# Altium PCB zasilaczsymetr.PcbDoc
Units mm, origin at the board's own origin, x right, y up, seen from the top; angles counter-clockwise.
Board outline 88 x 78 mm, 2 copper layers (Top Layer, Bottom Layer); 38 components, 17 nets, 92 pads, 0 vias.
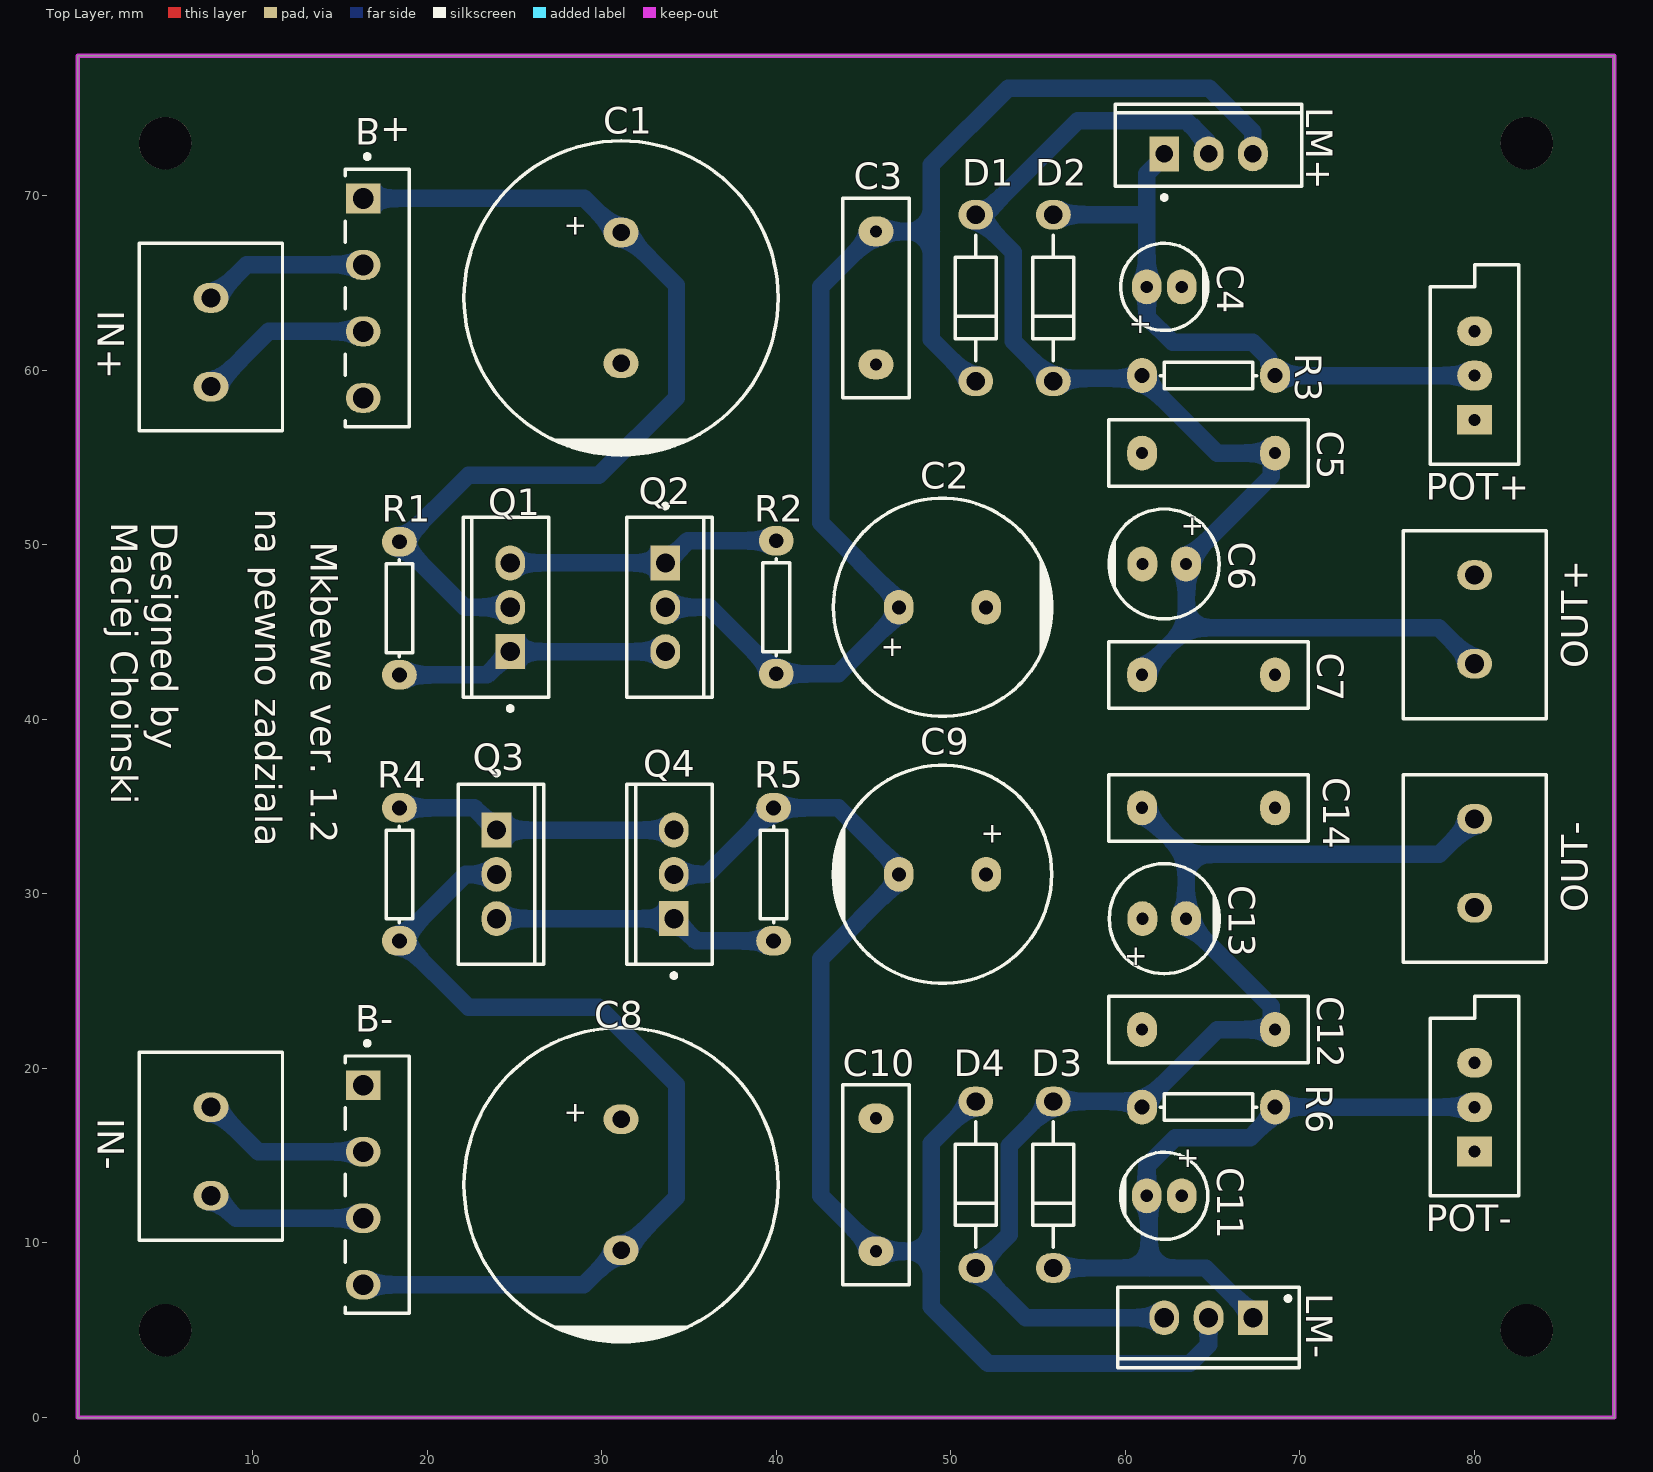
[diagram p0: Top Layer view]
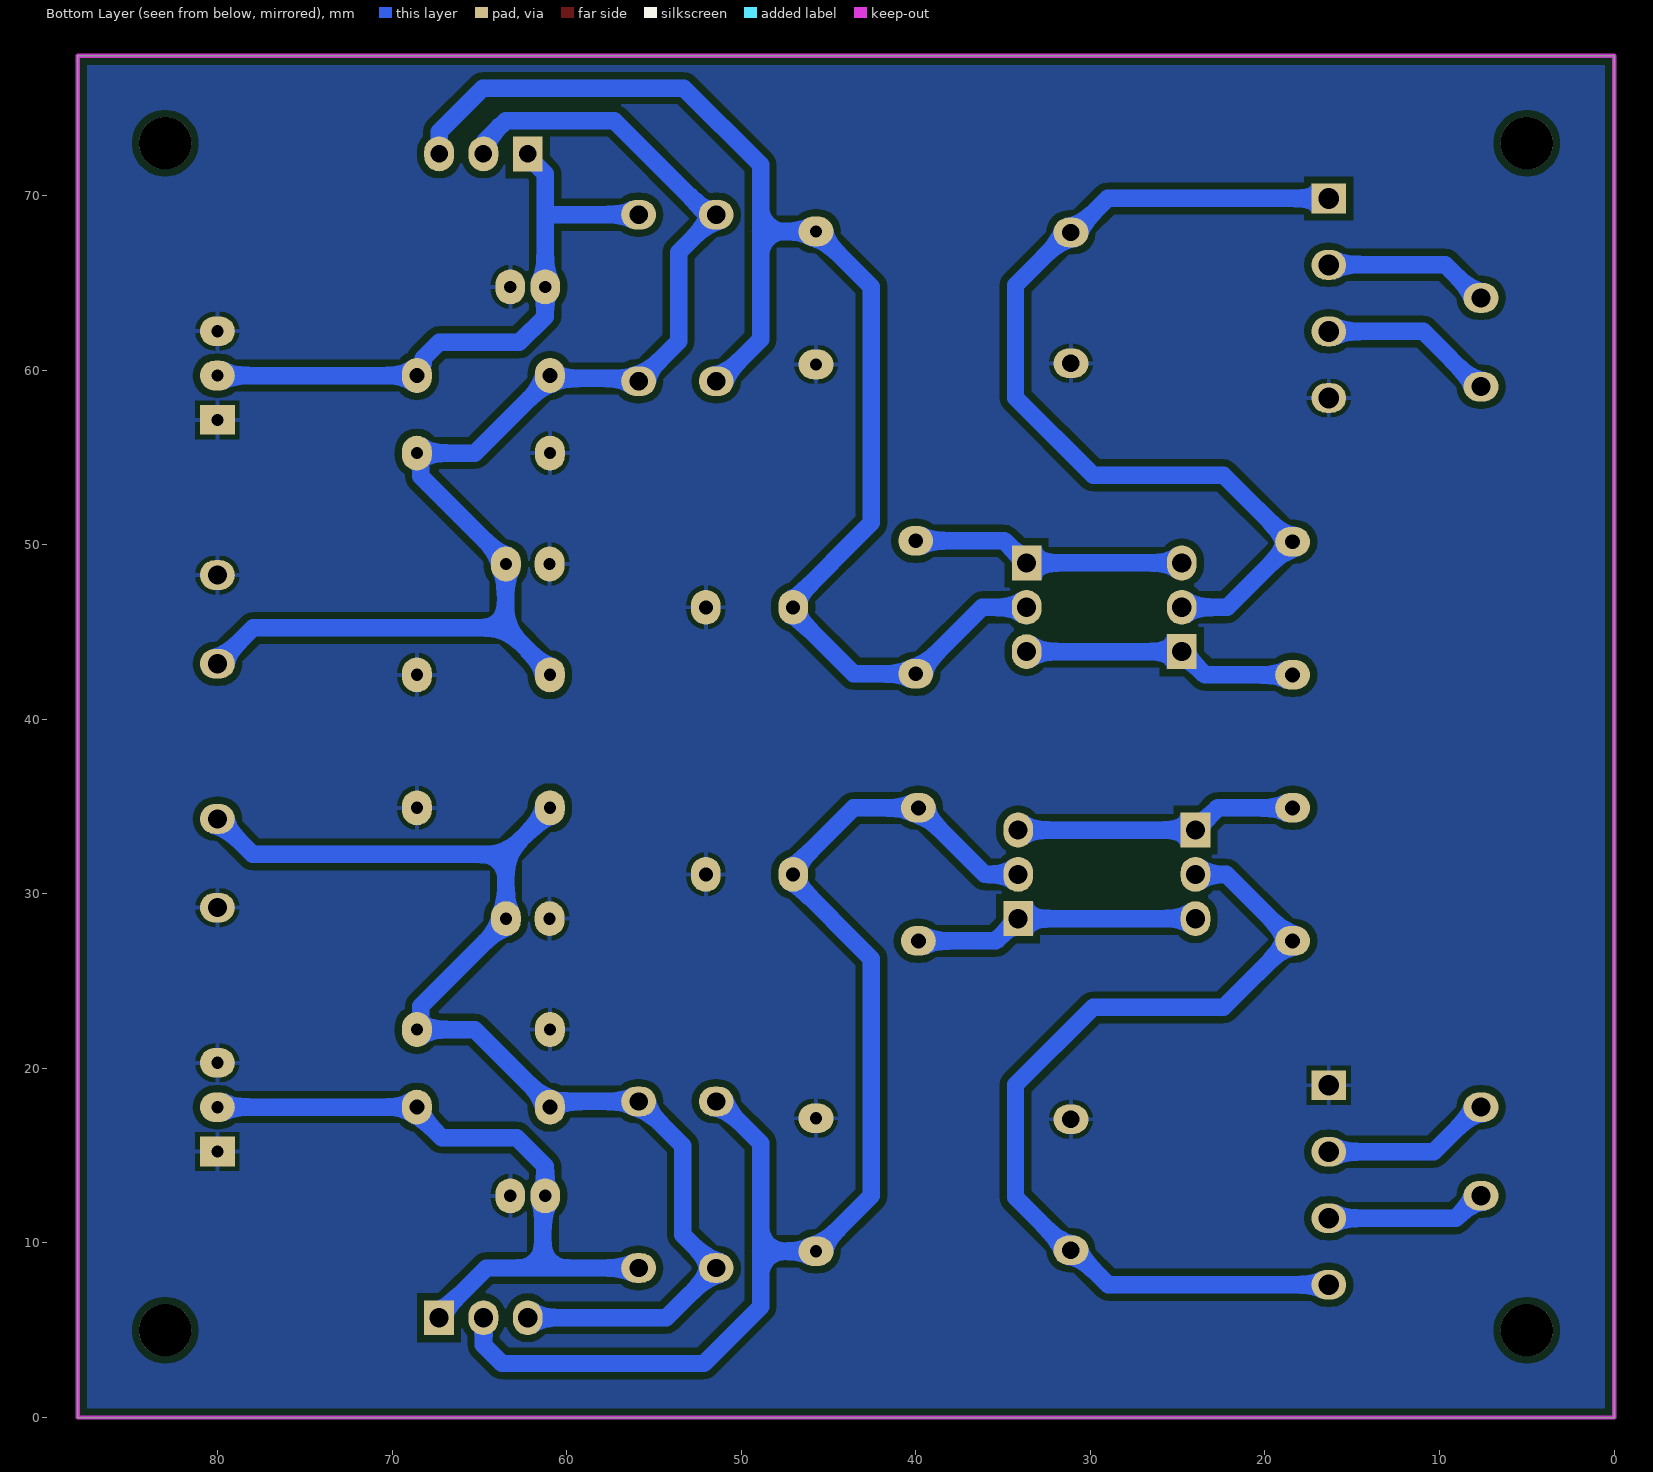
[diagram p1: Bottom Layer view, seen from below]

## Layer stack, top to bottom
Top Solder: solder mask 0.0102, Solder Resist, Dk 3.5
Top Layer: signal copper 0.0356
Dielectric 1: dielectric 0.32, FR-4, Dk 4.8
Bottom Layer: signal copper 0.0356
Bottom Solder: solder mask 0.0102, Solder Resist, Dk 3.5

## Board outline
0,0 0,78 88,78 88,0

## Design rules (kind name [scope] priority, off if disabled: settings)
Clearance [All] p1: gap=0.25 ignorepadtopadclearanceinfootprint=FALSE except(0.4: Arc-Fill Arc-Poly Arc-Region Track-Fill Track-Poly Track-Region THPad-Fill THPad-Poly THPad-Region)
HoleSize [All] p1: absolutevalues=TRUE maxlimit=5 minlimit=0.25 maxpercent=80.000 minpercent=20.000
HoleToHoleClearance [All] p1: gap=0.5 allowstackedmicrovias=TRUE
MinimumAnnularRing [All] p1: minimumring=0.254
PolygonConnect [All] p1: connectstyle=Relief reliefconductorwidth=0.254 reliefentries=4 polygonreliefangle="90 Angle" airgapwidth=0.254
RoutingVias [All] p1: holewidth=0.4 width=0.6 viastyle="Through Hole" minholewidth=0.3 minwidth=0.6 maxholewidth=0.711 maxwidth=1.5
SolderMaskExpansion [All] p1: expansion=0.102 istentingtop=FALSE
UnRoutedNet [All] p1: checkbadconnections=TRUE
Width [All] p1: maxlimit=1.5 minlimit=0.127 preferedwidth=0.5
27 further rules are at their usual default settings.

## Components (designator, comment, footprint, x,y, rotation, side; value= is the part's Value field where it differs from the comment)
B+ "KBP206G" FP-KBP-MFG 17.145,64.135 r270 top value=25pF
B- "KBP206G" FP-KBP-MFG 17.145,13.335 r270 top value=25pF
C1 "4.7MF" "CAP TH ALUM ELEC D18.00mm S7.50mm H21.50mm" 31.115,64.135 r90 top
C2 "470µF" "CAP TH ALUM ELEC D12.50mm S5.00mm H14.00mm" 49.53,46.415 r180 top
C3 "Cap" RAD-0.3 45.72,64.135 r90 top value=100nF
C4 "22µF" "CAP TH ALUM ELEC D5.00mm S2.00mm H11.00mm" 62.23,64.77 r180 top
C5 "Cap" RAD-0.3 64.77,55.245 r0 top value=100nF
C6 "47µF" "CAP TH ALUM ELEC D6.30mm S2.50mm H11.00mm" 62.23,48.895 r0 top
C7 "Cap" RAD-0.3 64.77,42.545 r180 top value=100nF
C8 "4.7MF" "CAP TH ALUM ELEC D18.00mm S7.50mm H21.50mm" 31.115,13.335 r90 top
C9 "470µF" "CAP TH ALUM ELEC D12.50mm S5.00mm H14.00mm" 49.53,31.115 r0 top
C10 "Cap" RAD-0.3 45.72,13.335 r90 top value=100nF
C11 "22µF" "CAP TH ALUM ELEC D5.00mm S2.00mm H11.00mm" 62.23,12.7 r0 top
C12 "Cap" RAD-0.3 64.77,22.225 r180 top value=100nF
C13 "47µF" "CAP TH ALUM ELEC D6.30mm S2.50mm H11.00mm" 62.23,28.575 r180 top
C14 "Cap" RAD-0.3 64.77,34.925 r0 top value=100nF
D1 "1N4001" ONSC-AXIAL_LEAD-2-59-10_P 51.435,64.135 r90 top
D2 "1N4001" ONSC-AXIAL_LEAD-2-59-10_P 55.88,64.135 r90 top
D3 "1N4001" ONSC-AXIAL_LEAD-2-59-10_P 55.88,13.335 r90 top
D4 "1N4001" ONSC-AXIAL_LEAD-2-59-10_P 51.435,13.335 r90 top
IN+ "282837-2" "TE 282837-2" 7.62,61.595 r90 top
IN- "282837-2" "TE 282837-2" 7.62,15.24 r90 top
LM+ "LM317T" NDE0003A 64.77,72.39 r0 top
LM- "LM337SP" TO220 64.77,5.715 r180 top
OUT+ "282837-2" "TE 282837-2" 80.01,45.72 r270 top
OUT- "282837-2" "TE 282837-2" 80.01,31.75 r270 top
POT+ "RPot" VR5 80.01,59.69 r90 top value=2.7k
POT- "RPot" VR5 80.01,17.78 r90 top value=2.7k
Q1 "D44H8" ONSC-TO-220-3-221A-09 24.765,46.415 r180 top
Q2 "D44H8" ONSC-TO-220-3-221A-09 33.655,46.415 r0 top
Q3 "D44H8" ONSC-TO-220-3-221A-09 23.98,31.115 r0 top
Q4 "D44H8" ONSC-TO-220-3-221A-09 34.14,31.115 r180 top
R1 "Res1" AXIAL-0.3 18.415,46.355 r270 top value=220
R2 "Res1" AXIAL-0.3 40.005,46.415 r270 top value=1
R3 "Res1" AXIAL-0.3 64.77,59.69 r180 top value=220
R4 "Res1" AXIAL-0.3 18.415,31.115 r90 top value=1
R5 "Res1" AXIAL-0.3 39.855,31.115 r90 top value=220
R6 "Res1" AXIAL-0.3 64.77,17.78 r180 top value=220

## Footprints (in the part's own frame and the unit in brackets; to place one, negate y for a bottom-side part, rotate by r counter-clockwise, add the part's x,y. Pads: shape width x height; smd on the part's side, far side on the other; paste and mask are expansions set on the pad)
AXIAL-0.3 [mm] "Axial Device, Thru-Hole; 2 Leads; 0.3 in Pin Spacing"
  oval 1.7x2 hole 0.85: 1(-3.81,0) 2(3.81,0)
  silkscreen extent -2.77,-0.76 2.77,0.76
"CAP TH ALUM ELEC D5.00mm S2.00mm H11.00mm" [mm] "5mm Diameter 2mm Lead Spacing Aluminum Electrolytic Capacitors Radial, Can"
  oval 1.7x2 hole 0.7: 1(1,0) 2(-1,0)
  silkscreen extent -2.5,-2.5 2.5,2.5, body extent -2.51,-2.5 2.5,2.5, height 11
"CAP TH ALUM ELEC D6.30mm S2.50mm H11.00mm" [mm] "6.3mm Diameter 2.5mm Lead Spacing Aluminum Electrolytic Capacitors Radial, Can"
  oval 1.7x2 hole 0.7: 1(1.25,0) 2(-1.25,0)
  silkscreen extent -3.15,-3.15 3.15,3.15, body extent -3.16,-3.15 3.15,3.15, height 11
"CAP TH ALUM ELEC D12.50mm S5.00mm H14.00mm" [mm] "12.5mm Diameter 5mm Lead Spacing Aluminum Electrolytic Capacitors Radial, Can"
  oval 1.7x2 hole 0.8: 1(2.5,0) 2(-2.5,0)
  silkscreen extent -6.25,-6.25 6.25,6.25, body extent -6.26,-6.25 6.25,6.25, height 14
"CAP TH ALUM ELEC D18.00mm S7.50mm H21.50mm" [mm] "18mm Diameter 7.5mm Lead Spacing Aluminum Electrolytic Capacitors Radial, Can"
  oval 1.7x2 hole 1: 1(3.75,0) 2(-3.75,0)
  silkscreen extent -9,-9 9,9, body extent -9.01,-9 9,9, height 21.5
FP-KBP-MFG [mm]
  rect 1.7x2 hole 1.2 paste-1000 mask+0: 1(-5.7,-0.8)
  oval 1.7x2 hole 1.2 paste-1000 mask+0: 2(-1.89,-0.8) 3(1.92,-0.8) 4(5.73,-0.8)
  silkscreen extent -8.22,-1.82 7.38,1.82, body extent -7.25,-1.76 7.25,1.75, height 12.8
NDE0003A [mm] "FM, 3-Leads, Body 10.7x4.7mm, Pitch 2.54mm"
  rect 1.7x2 hole 1: 1(-2.54,0)
  oval 1.7x2 hole 1: 2(0,0) 3(2.54,0)
  silkscreen extent -5.35,-2.62 5.35,2.85, body extent -5.4,-1.9 5.4,2.9, height 19.4
ONSC-AXIAL_LEAD-2-59-10_P [mm] "AXIAL, 2-Leads, Diameter 2.35mm"
  oval 1.7x2 hole 1.05: 1(-4.77,0) 2(4.77,0)
  silkscreen extent -3.6,-1.18 3.6,1.18
ONSC-TO-220-3-221A-09 [mm] "FM, 3-Leads, Body 10.3x4.85mm, Pitch 2.54mm"
  rect 1.7x2 hole 1.1: 1(0,2.54)
  oval 1.7x2 hole 1.1: 2(0,0) 3(0,-2.54)
  silkscreen extent -2.21,-5.15 2.69,5.92, body extent -2.18,-5.15 2.67,5.15, height 19.85
RAD-0.3 [mm] "Radial Cap, Thru-Hole; 2 Leads; 0.3 in Pin Spacing"
  oval 1.7x2 hole 0.7: 1(-3.81,0) 2(3.81,0)
  silkscreen extent -5.71,-1.91 5.71,1.91
"TE 282837-2" [mm] "Wire to Board Terminal Block Horizontal with Board, 2 Postions, Body 10.76x8.2 mm, Pitch 5.08mm"
  oval 1.7x2 hole 1.1: 1(-2.54,0) 2(2.54,0)
  silkscreen extent -5.08,-4.1 5.68,4.1, body extent -5.08,-4.1 5.68,4.1, height 10.3
TO220 [mm] "TO, Thru-Hole, Vertical, Heatsink Mounted; 3 In-Line Leads; Pitch 2.54 mm"
  rect 1.7x2 hole 1.1: 1(-2.54,0)
  oval 1.7x2 hole 1.1: 2(0,0) 3(2.54,0)
  silkscreen extent -5.2,-1.75 5.2,2.85, body extent -5.25,-1.8 5.25,2.9, height 19.7
VR5 [mm] "Thru-Hole; 3 Leads"
  rect 1.7x2 hole 0.7: 1(-2.54,0)
  oval 1.7x2 hole 0.7: 2(0,0) 3(2.54,0)
  silkscreen extent -5.08,-2.54 6.35,2.54

## Part data
B+ B-: library part CMP-12791-000035-1, "BRIDGE RECT 1PHASE 600V 2A KBP", Capacitance=25pF, Forward Current=2A, manufacturer="Diodes Inc.", Max Junction Temp=+150°C, Max Repetitive Reverse Voltage=600V, Max Surge Forward Current=65A, Package=KBP, Peak Reverse Current=5uA, Temperature="-65°C to +150°C", Temperature Range Low=-65°C, Automotive=No, Category=Diode, componentlink2description=Datasheet, componentlink2url=https://www.diodes.com/assets/Datasheets/ds21205.pdf, Device Class L1="Discrete Semiconductors", Device Class L2=Diodes, Device Class L3="Rectifier Diodes", Digikey Description="BRIDGE RECT 1PHASE 600V 2A KBP", Footprint Url=https://www.diodes.com/assets/Package-Files/KBP.pdf, Height=12.8mm, Lead Free=Yes, Manufacturer Part Number=KBP206G, Mouser Description="Bridge Rectifiers 2.0A 600V", Octopart=https://octopart.com/kbp206g-diodes+inc.-330175, Reverse Voltage=600V, RoHS=TRUE, Standoff Height=1.8mm, Temperature Range High=+150°C
C1 C8: library part EKYC250ELL472MM20S, "ALUMINUM CAPACITOR", Device Package="Radial, Can", ESR (Equivalent Series Resistance)="37mOhm @ 100kHz", Lifetime @ Temp.="5000 Hrs @ 105°C", manufacturer="United Chemi-Con", Operating Temperature="-40°C ~ 105°C", Ratings=AEC-Q200, Ripple Current @ High Frequency="2.7A @ 100kHz", Ripple Current @ Low Frequency="2.295A @ 120Hz", Supplier Part Number 1=565-EKYC250ELL472MM20S-ND, Tolerance=±20%, Voltage - Rated=25V, Applications=Automotive, Capacitance=4.7MF, componentlink1description=Datasheet, componentlink1url=http://www.chemi-con.co.jp/cgi-bin/CAT_DB/SEARCH/cat_db_al.cgi?e=e&j=p&pdfname=kyc, componentlink2description="DigiKey Link", componentlink2url=http://digikey.com/product-detail/en/united-chemi-con/EKYC250ELL472MM20S/565-EKYC250ELL472MM20S-ND/10486416, Height - Seated (Max)="0.846\" (21.50mm)", lastupdated="02.09.2020 01:33:14", Lead Spacing="0.295\" (7.50mm)", Lifecycle Status=Active, Minimum Order=1, Mounting Type="Through Hole", Package / Case="Radial, Can", packaging=Bulk, Part Number=EKYC250ELL472MM20S, Part Status=Active, partid=18010, Polarization=Polar, price=1.57, series=KYC, Size / Dimension="0.709\" Dia (18.00mm)", Supplier 1=DigiKey
C2 C9: library part URZ1V471MHD, "CAP ALUM 470UF 20% 35V RADIAL", Device Package="Radial, Can", Lifetime @ Temp.="1000 Hrs @ 105°C", manufacturer=Nichicon, Operating Temperature="-55°C ~ 105°C", Ripple Current @ Low Frequency="420mA @ 120Hz", Supplier Part Number 1=493-15958-ND, Tolerance=±20%, Voltage - Rated=35V, Applications="General Purpose", Capacitance=470µF, componentlink1description=Datasheet, componentlink1url=http://nichicon-us.com/english/products/pdfs/e-urz.pdf, componentlink2description="DigiKey Link", componentlink2url=http://digikey.com/product-detail/en/nichicon/URZ1V471MHD/493-15958-ND/2539001, Height - Seated (Max)="0.551\" (14.00mm)", lastupdated="02.09.2020 01:31:53", Lead Spacing="0.197\" (5.00mm)", Lifecycle Status=Active, Minimum Order=1, Mounting Type="Through Hole", Package / Case="Radial, Can", packaging=Bulk, Part Number=URZ1V471MHD, Part Status=Active, partid=13716, Polarization=Polar, price=0.78, series=URZ, Size / Dimension="0.492\" Dia (12.50mm)", Supplier 1=DigiKey
C3 C5 C7 C10 C12 C14: "Capacitor", LatestRevisionDate=17-Jul-2002, LatestRevisionNote="Re-released for DXP Platform.", PackageDescription="Radial Cap, Thru-Hole; 2 Leads; 0.3 in Pin Spacing", PackageReference=RAD-0.3, Published=8-Jun-2000, Publisher="Altium Limited"
C4 C11: library part EEU-FC1V220, "CAP ALUM 22UF 20% 35V RADIAL", Device Package="Radial, Can", Lifetime @ Temp.="1000 Hrs @ 105°C", manufacturer="Panasonic Electronic Components", Operating Temperature="-55°C ~ 105°C", Ratings=AEC-Q200, Ripple Current @ High Frequency="175mA @ 100kHz", Ripple Current @ Low Frequency="113.8mA @ 120Hz", Supplier Part Number 1=P11230-ND, Tolerance=±20%, Voltage - Rated=35V, Applications=Automotive, Capacitance=22µF, componentlink1description=Datasheet, componentlink1url=http://industrial.panasonic.com/www-cgi/jvcr13pz.cgi?E+PZ+3+ABA0022+EEUFC1V220+7+WW, componentlink2description="DigiKey Link", componentlink2url=http://digikey.com/product-detail/en/panasonic-electronic-components/EEU-FC1V220/P11230-ND/356133, Height - Seated (Max)="0.433\" (11.00mm)", Impedance="800 mOhms", lastupdated="04.09.2020 23:28:57", Lead Spacing="0.079\" (2.00mm)", Lifecycle Status=Active, Minimum Order=1, Mounting Type="Through Hole", Package / Case="Radial, Can", packaging=Bulk, Part Number=EEU-FC1V220, Part Status=Active, partid=21502, Polarization=Polar, price=0.29, series=FC, Size / Dimension="0.197\" Dia (5.00mm)", Supplier 1=DigiKey
C6 C13: library part UKW1H470MED, "CAP ALUM 47UF 20% 50V RADIAL", Device Package="Radial, Can", Lifetime @ Temp.="2000 Hrs @ 85°C", manufacturer=Nichicon, Operating Temperature="-40°C ~ 85°C", Ripple Current @ High Frequency="300mA @ 10kHz", Ripple Current @ Low Frequency="150mA @ 120Hz", Supplier Part Number 1=493-15492-ND, Tolerance=±20%, Voltage - Rated=50V, Applications=Audio, Capacitance=47µF, componentlink1description=Datasheet, componentlink1url=http://nichicon-us.com/english/products/pdfs/e-ukw.pdf, componentlink2description="DigiKey Link", componentlink2url=http://digikey.com/product-detail/en/nichicon/UKW1H470MED/493-15492-ND/1964262, Height - Seated (Max)="0.433\" (11.00mm)", lastupdated="04.09.2020 01:05:43", Lead Spacing="0.098\" (2.50mm)", Lifecycle Status=Active, Minimum Order=1, Mounting Type="Through Hole", Package / Case="Radial, Can", packaging=Bulk, Part Number=UKW1H470MED, Part Status=Active, partid=19951, Polarization=Polar, price=0.47, series=UKW, Size / Dimension="0.248\" Dia (6.30mm)", Supplier 1=DigiKey
D1 D2 D3 D4: library part CMP-0902-00117-1, "Standard Recovery Rectifier, 2-Pin Axial_Lead, Pb-Free, Bulk Bag", manufacturer="On Semiconductor", componentlink1description="Manufacturer URL", componentlink1url=http://www.onsemi.com/, componentlink2description=Datasheet, componentlink2url=http://www.onsemi.com/pub_link/Collateral/1N4001-D.PDF, ComponentLink3Description="Package Specification", ComponentLink3URL=http://www.onsemi.cn/pub_link/Collateral/59-10.PDF, DatasheetVersion="Rev. 13", IFSM Max (A)=30, IO(rec) Max (A)=1, Mounting Technology="Through Hole", PackageDescription="2-Pin, Axial Lead, Diameter 2.35 mm", PackageReference=AXIAL_LEAD-2-59-10, PackageVersion="Rev. U, 02/2005", Packing="Bulk Bag", PartNumber=1N4001, RoHS=TRUE, Type="Standard Recovery", VRRM Max (V)=50
IN+ IN- OUT+ OUT-: "TERM BLK 2P SIDE ENT 5.08MM PCB", Color=Green, Current="13.5 A", manufacturer="TE Connectivity AMP Connectors", Supplier Part Number 1=A113320-ND, Voltage="300 V", componentlink1description=Datasheet, componentlink1url=https://www.te.com/commerce/DocumentDelivery/DDEController?Action=srchrtrv&DocNm=282837&DocType=Customer+Drawing&DocLang=English, componentlink2description="DigiKey Link", componentlink2url=https://www.digikey.com/en/products/detail/te-connectivity-amp-connectors/282837-2/2187973, Features="Interlocking (Side)", lastupdated="21.06.2022 15:00:23", Lifecycle Status=Active, Mating Orientation="Horizontal with Board", Minimum Order=1, Mounting Type="Through Hole", Number of Levels=1, packaging=Tray, Part Number=282837-2, Part Status=Active, Pitch="0.200\" (5.08mm)", Positions Per Level=2, price=0.31, series=Buchanan, Supplier 1=DigiKey, Wire Gauge="16-28 AWG", Wire Termination="Screw - Rising Cage Clamp"
LM+: library part CMP-0062-02456-3, "3-Terminal Adjustable Regulator, 3-pin TO-220", manufacturer="Texas Instruments", PackageTopMarking="NSUZXYTTE#*LM317T P+", PowerWise=N, componentlink1description="Datasheet URL", componentlink1url=http://www.ti.com/general/docs/lit/getliterature.tsp?genericPartNumber=LM317-N&fileType=pdf, CompType="LDO IC", PackageDescription="TO-220, Molded, 3 Lead, Straight", PackageReference=NDE0003A, PinCount=3, RoHS=N
LM-: library part CMP-0244-00420-1, "Three-Terminal Negative Voltage Regulator, 3-Pin TO-220", componentlink1description="Manufacturer URL", componentlink1url=http://www.st.com, componentlink2description=Datasheet, componentlink2url=http://www.st.com/internet/com/TECHNICAL_RESOURCES/TECHNICAL_LITERATURE/DATASHEET/CD00000468.pdf, ComponentLink3Description="Package Specification", ComponentLink3URL=http://www.st.com/internet/com/TECHNICAL_RESOURCES/TECHNICAL_LITERATURE/PACKAGE_INFORMATION/CD00004649.pdf, DatasheetVersion=1/10/2011, PackageDescription="TO, Thru-Hole, Vertical, Heatsink Mounted; 3 In-Line Leads; Pitch 2.54 mm", PackageReference=TO220, PackageVersion=ver3.0
POT+ POT-: "Potentiometer", LatestRevisionDate=17-Jul-2002, LatestRevisionNote="Re-released for DXP Platform.", PackageDescription="Variable Resistor, Thru-Hole; 3 Leads", PackageReference=VR5, Published=8-Jun-2000, Publisher="Altium Limited", Set Position=0.5, Sim Note="Enter the Resistance value and the set point into parameter fields."
Q1 Q2 Q3 Q4: library part CMP-1048-01189-1, "Complementary Silicon Power Transistor, 3-Pin TO-220, Tube", manufacturer="On Semiconductor", componentlink1description="Manufacturer URL", componentlink1url=http://www.onsemi.com/, componentlink2description=Datasheet, componentlink2url=http://www.onsemi.com/pub_link/Collateral/D44H-D.PDF, ComponentLink3Description="Package Specification", ComponentLink3URL=http://www.onsemi.com/pub_link/Collateral/221A-09.PDF, DatasheetVersion="Rev. 12", IC Continuous (A)=10, Mounting Technology="Through Hole", PackageDescription="3-Pin Flange Mount, Vertical Straight Lead, Body 9.97 x 4.445 mm, Pitch 2.54 mm", PackageReference=TO-220-3-221A-09, PackageVersion="Rev. AG, 09/2011", Packing=Tube, PartNumber=D44H8, Polarity=NPN, RoHS=FALSE
R1 R2 R3 R4 R5 R6: "Resistor", LatestRevisionDate=17-Jul-2002, LatestRevisionNote="Re-released for DXP Platform.", PackageDescription="Axial Device, Thru-Hole; 2 Leads; 0.3 in Pin Spacing", PackageReference=AXIAL-0.3, Published=8-Jun-2000, Publisher="Altium Limited"

## Free pads (board coordinates)
  round 3 hole 3: 2(5,5) 2(5,73) 2(83,5) 2(83,73)

## Nets (pads, with @x,y where several pads share a name; then routed paths per layer and width w, separated by ;. In a path a pad name is that pad's centre, name@x,y a point inside that pad or via, vN(x,y) a via of type N, cw(c..) or ccw(c..) an arc to the next point about the centre after c; other vN are vias at no path point)
GND: B+.4 B-.1 C1.2 C2.2 C3.1 C4.2 C5.1 C6.2 C7.1 C8.1 C9.1 C10.2 C11.1 C12.2 C13.1 C14.2 OUT+.1 OUT-.2 POT+.1 POT+.3 POT-.1 POT-.3
NetB+_1: B+.1 C1.1 Q1.2 R1.1 | length 53.6
  Bottom Layer w1: B+.1 29.015,69.835 30.965,67.885 C1.1 31.265,67.885 34.29,64.86 34.29,58.42 29.845,53.975 22.375,53.975 18.565,50.165 R1.1 22.165,46.415 Q1.2
NetB+_2: B+.2 IN+.2 | length 9.9
  Bottom Layer w1: IN+.2 7.77,64.135 9.675,66.04 16.33,66.04 B+.2 B+.2@15.98,66.025
NetB+_3: B+.3 IN+.1 | length 10
  Bottom Layer w1: IN+.1 7.77,59.055 10.93,62.215 B+.3
NetB-_2: B-.2 IN-.2 | length 9.8
  Bottom Layer w1: IN-.2 7.77,17.78 10.325,15.225 B-.2
NetB-_3: B-.3 IN-.1 | length 9.3
  Bottom Layer w1: IN-.1 7.77,12.7 9.055,11.415 B-.3
NetB-_4: B-.4 C8.2 Q3.2 R4.1 | length 52.9
  Bottom Layer w1: B-.4 28.985,7.605 30.965,9.585 C8.2 31.265,9.585 34.29,12.61 34.29,19.05 29.845,23.495 22.375,23.495 18.565,27.305 R4.1 22.225,31.115 Q3.2
NetC2_1: C2.1 C3.2 D1.1 LM+.3 Q2.2 R2.2 | length 80.7
  Bottom Layer w1: Q2.2 36.195,46.415 R2.2 43.57,42.605 47.03,46.065 C2.1 47.03,46.765 42.545,51.25 42.545,64.77 C3.2 48.895,67.945 ; D1.1 51.285,59.365 48.895,61.755 48.895,67.945 ; LM+.3 67.31,73.66 64.811,76.159 53.299,76.159 48.895,71.755 48.895,67.945
NetC4_1: C4.1 D2.2 LM+.1 POT+.2 R3.1 | length 35.7
  Bottom Layer w1: D2.2 61.158,68.905 61.23,68.977 ; LM+.1 62.23,72.24 61.23,71.24 61.23,68.905 C4.1 61.23,63.07 62.705,61.595 67.31,61.595 68.23,60.675 68.23,60.379 68.58,60.029 R3.1 POT+.2
NetC5_2: C5.2 C6.1 C7.2 D1.2 D2.1 LM+.2 OUT+.2 R3.2 | length 75.9
  Bottom Layer w1: D1.2 53.594,66.746 53.594,61.651 D2.1 56.043,59.527 60.797,59.527 R3.2 60.96,59.54 65.255,55.245 C5.2 68.35,55.015 68.35,53.915 63.48,49.045 C6.1 63.5,48.875 63.5,45.235 ; D1.2@51.655,68.786 52.124,69.255 52.225,69.255 57.265,74.295 63.5,74.295 64.655,73.14 64.655,72.505 LM+.2 ; C7.2 C7.2@61.595,43.18 ; C7.2@61.52,43.255 63.5,45.235 ; OUT+.2 77.955,45.235 63.5,45.235
NetC9_2: C9.2 C10.1 D4.2 LM-.2 Q4.2 R5.2 | length 76.3
  Bottom Layer w1: Q4.2 36.045,31.115 R5.2 43.57,34.925 47.03,31.465 C9.2 47.03,30.765 42.545,26.28 42.545,12.7 C10.1 48.895,9.525 ; D4.2 51.285,18.105 48.895,15.715 48.895,9.525 ; LM-.2 64.77,4.165 63.699,3.094 52.151,3.094 48.895,6.35 48.895,9.525
NetC11_2: C11.2 D3.1 LM-.1 POT-.2 R6.1 | length 39
  Bottom Layer w1: D3.1 61.364,8.565 ; LM-.1 67.31,5.865 64.61,8.565 61.364,8.565 ; POT-.2 R6.1 68.58,17.465 67.15,16.035 62.865,16.035 61.23,14.4 C11.2 61.364,12.566 61.364,8.565
NetC12_1: C12.1 C13.2 C14.1 D3.2 D4.1 LM-.3 OUT-.1 R6.2 | length 71.3
  Bottom Layer w1: C14.1 C14.1@61.595,34.29 ; C14.1@61.52,34.215 63.48,32.255 ; LM-.3 54.285,5.715 D4.1 53.34,10.47 53.34,15.565 D3.2 60.391,18.105 60.716,17.78 R6.2 60.96,17.93 65.255,22.225 C12.1 68.35,22.455 68.35,23.555 63.48,28.425 C13.2 63.48,32.255 ; OUT-.1 77.975,32.255 63.48,32.255
NetQ1_1: Q1.1 Q2.3 R1.2 | length 15.8
  Bottom Layer w1: R1.2 23.435,42.545 Q1.1 Q2.3
NetQ1_3: Q1.3 Q2.1 R2.1 | length 15.8
  Bottom Layer w1: Q1.3 Q2.1 34.925,50.225 R2.1
NetQ3_1: Q3.1 Q4.3 R4.2 | length 16.3
  Bottom Layer w1: R4.2 22.71,34.925 Q3.1 Q4.3
NetQ3_3: Q3.3 Q4.1 R5.1 | length 16.4
  Bottom Layer w1: Q3.3 Q4.1 35.41,27.305 R5.1

## Polygon pours and split planes (outlines as drawn)
GND on Bottom Layer "NONET_L-01_P-001" (solid, remove dead copper, pour order 0): 88,78.105 0,78.105 0,0 88,0

## Keep-outs
Keep-Out Layer:
  the board outline again, w0.254

## Silkscreen, mask and mechanical layers (free items; w line width, h text height)
Top Overlay:
  text "na pewno zadziala" at 10.16,52.07 h1.52 r270
  text "Designed by  / Maciej Choinski" at 1.905,51.276 h1.52 r270
  text "Mkbewe ver. 1.2" at 13.335,50.165 h1.52 r270

## Text inside footprints (layer, text, board x,y; h text height)
C1: Top Overlay "+" at 29.415,67.585 h2 r90
C2: Top Overlay "+" at 47.33,45.015 h2 r180
C4: Top Overlay "+" at 61.53,63.52 h2 r180
C6: Top Overlay "+" at 63.18,50.145 h2
C8: Top Overlay "+" at 29.415,16.785 h2 r90
C9: Top Overlay "+" at 51.73,32.515 h2
C11: Top Overlay "+" at 62.93,13.95 h2
C13: Top Overlay "+" at 61.28,27.325 h2 r180